# Altium PCB TestPCB_2561.PcbDoc
Units mm, origin at the board's own origin, x right, y up, seen from the top; angles counter-clockwise.
Board outline 90 x 100 mm, 2 copper layers (Top Layer, Bottom Layer); 24 components, 25 nets, 147 pads, 11 vias.
Unrouted connection lines stored in the file: 24.
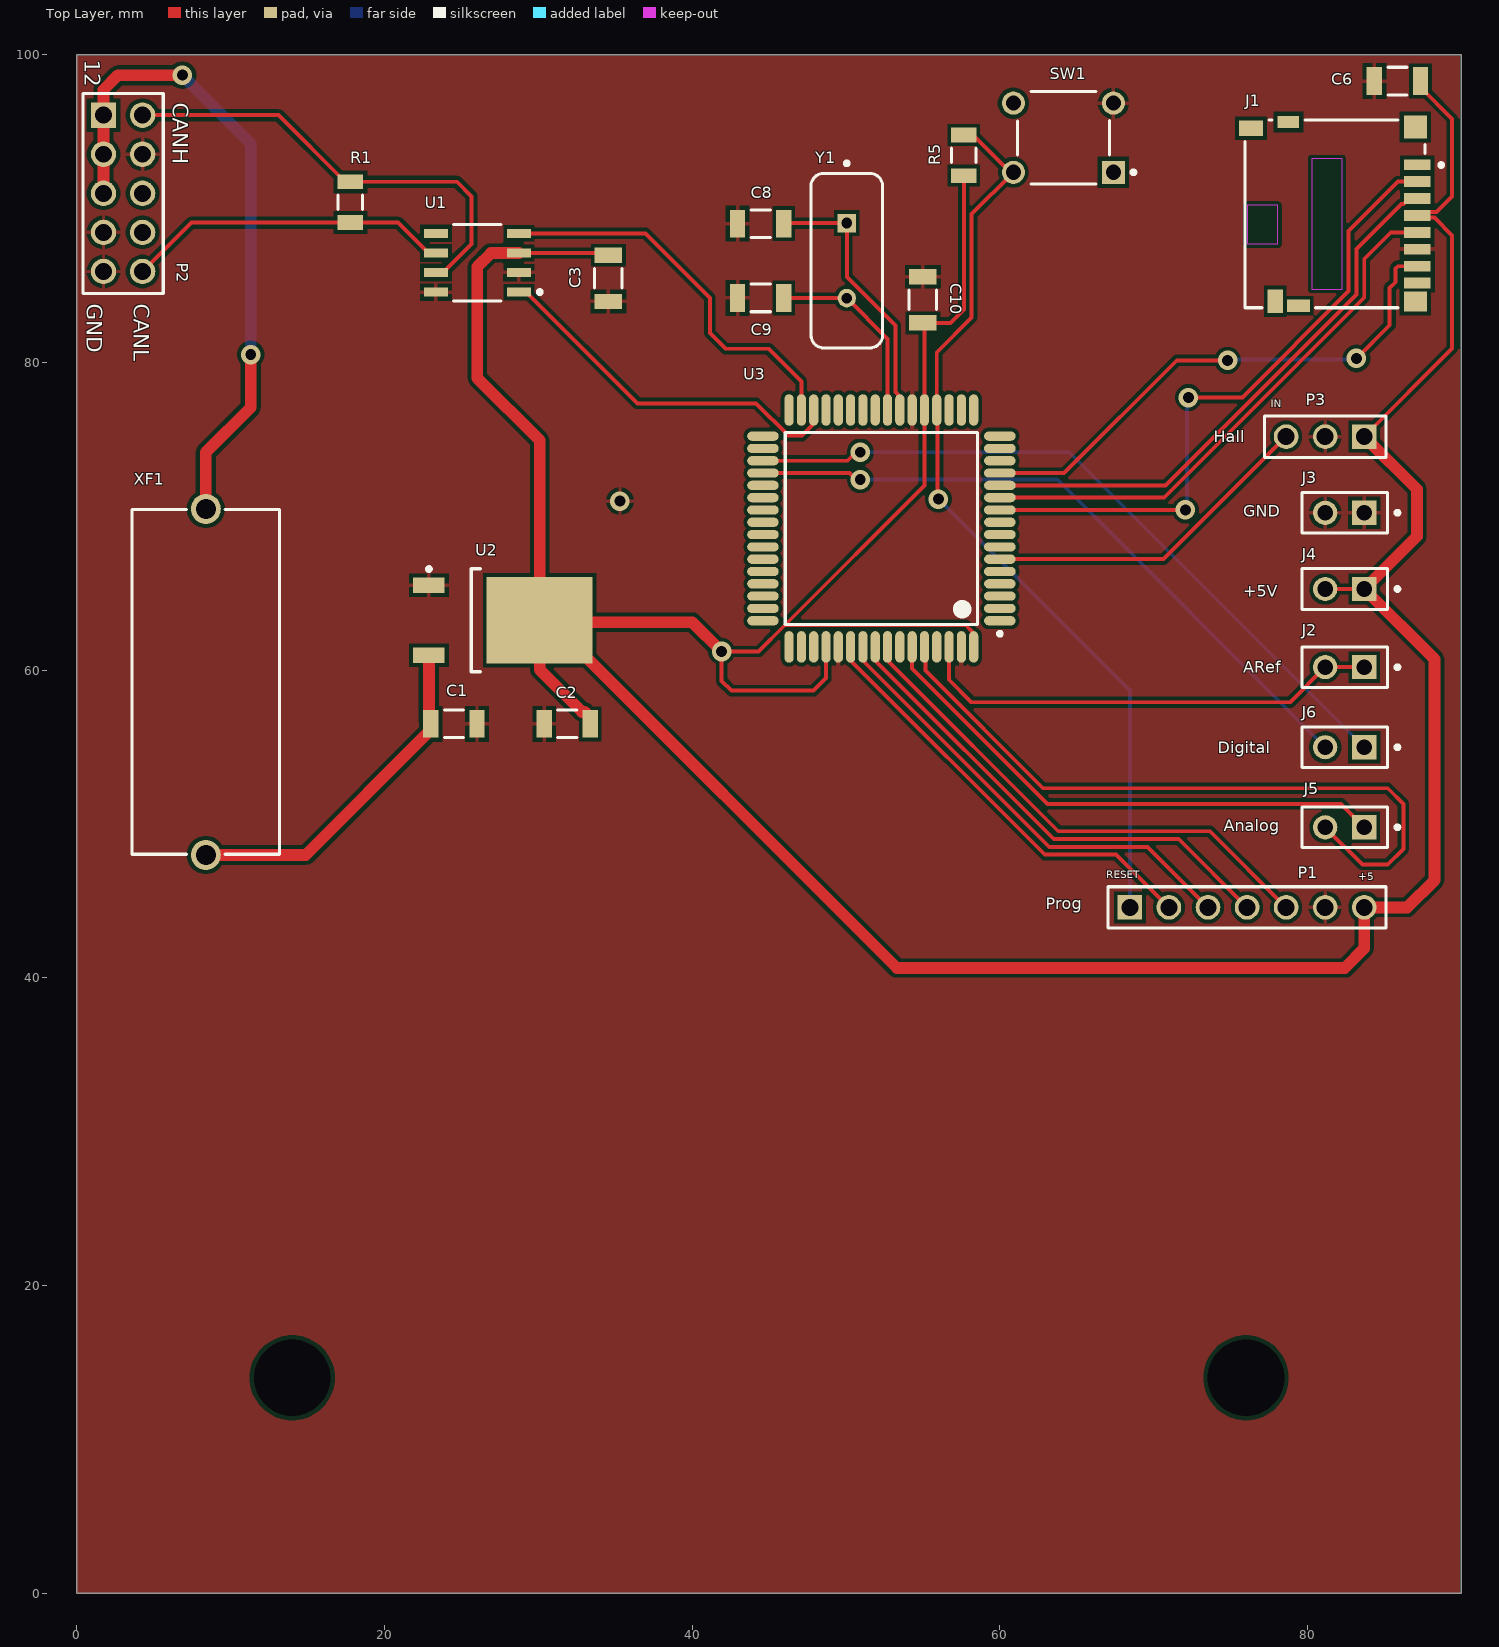
[diagram p0: Top Layer view]
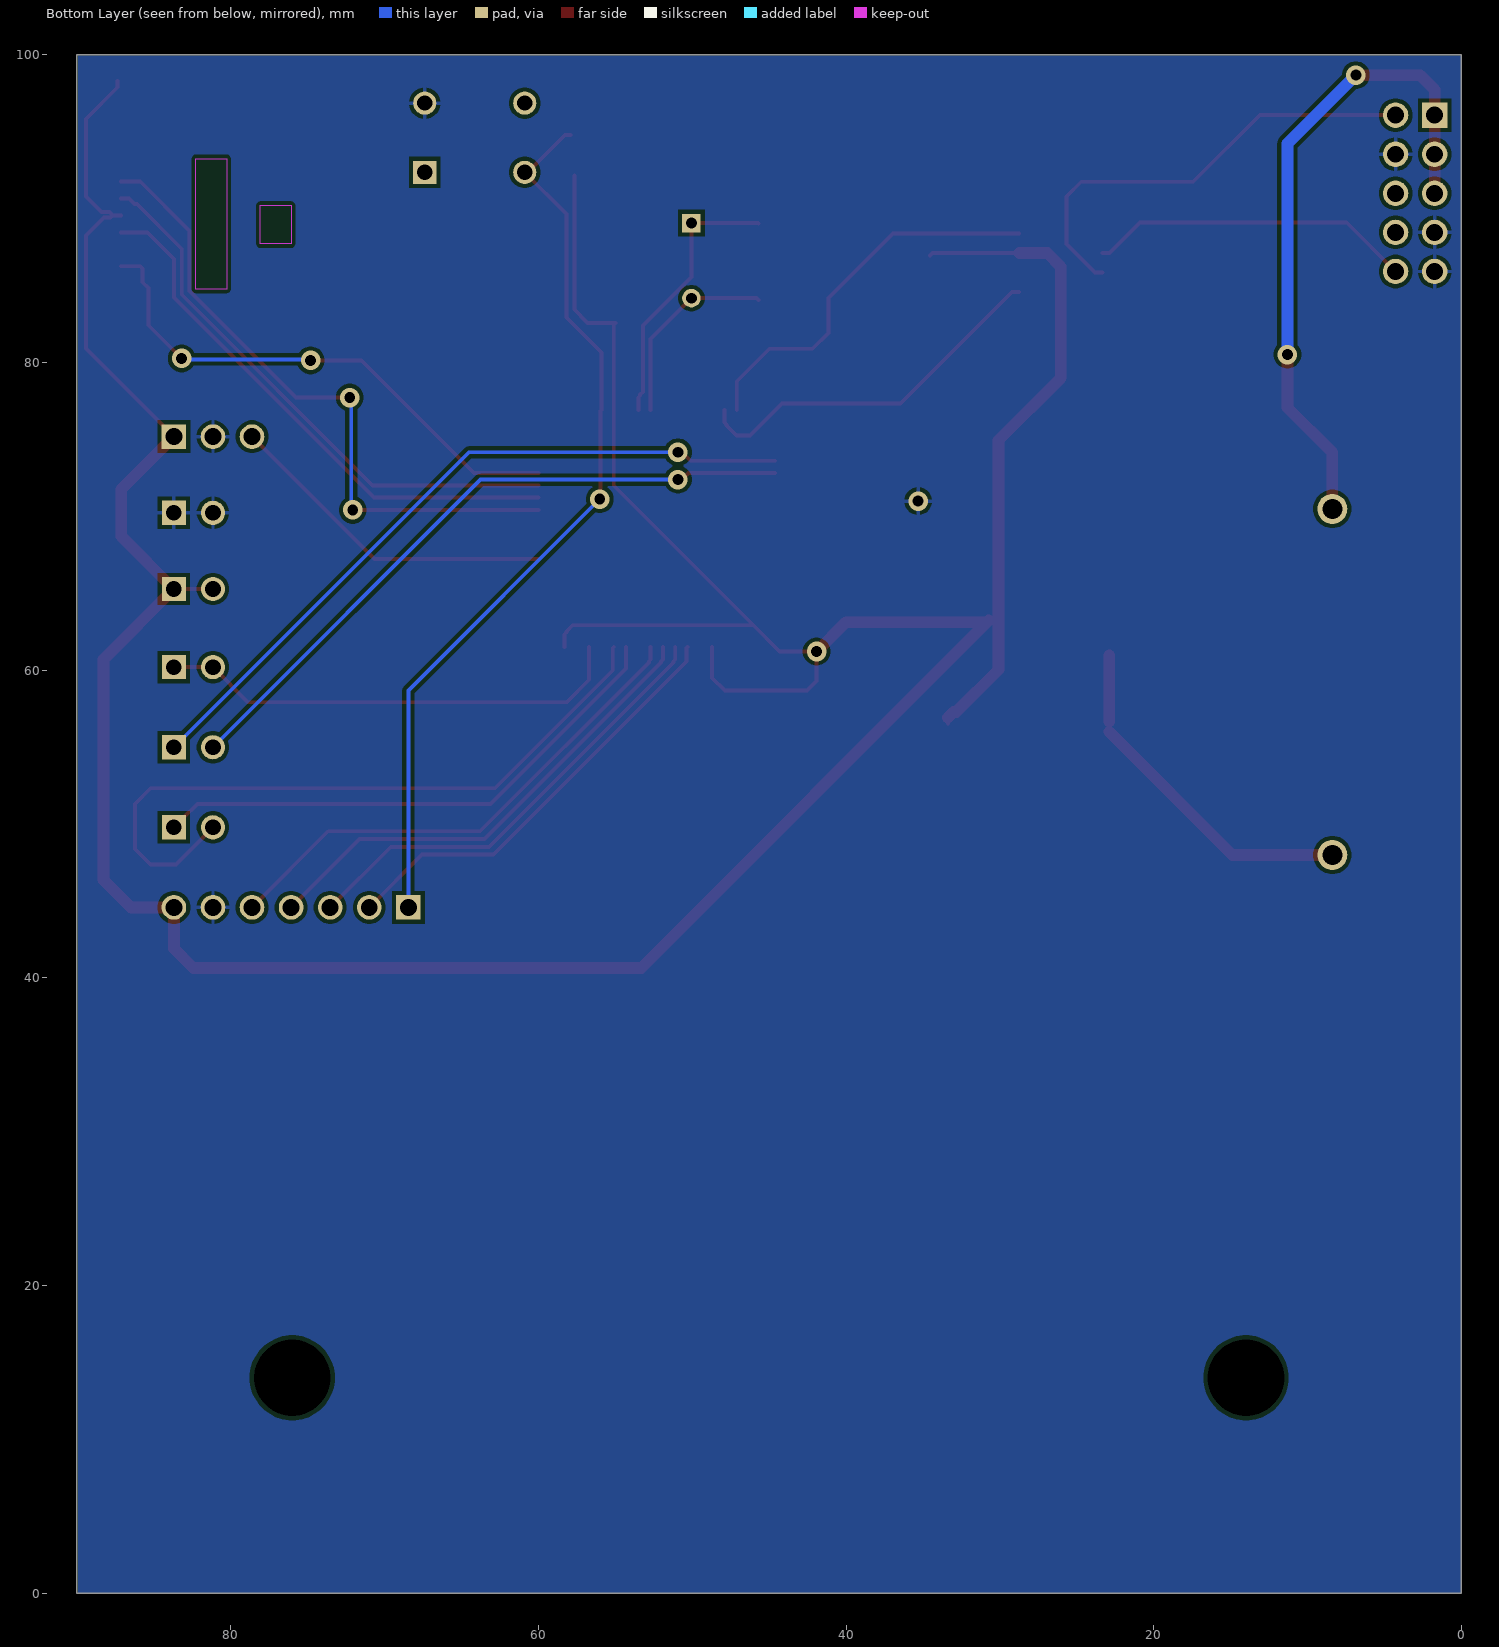
[diagram p1: Bottom Layer view, seen from below]
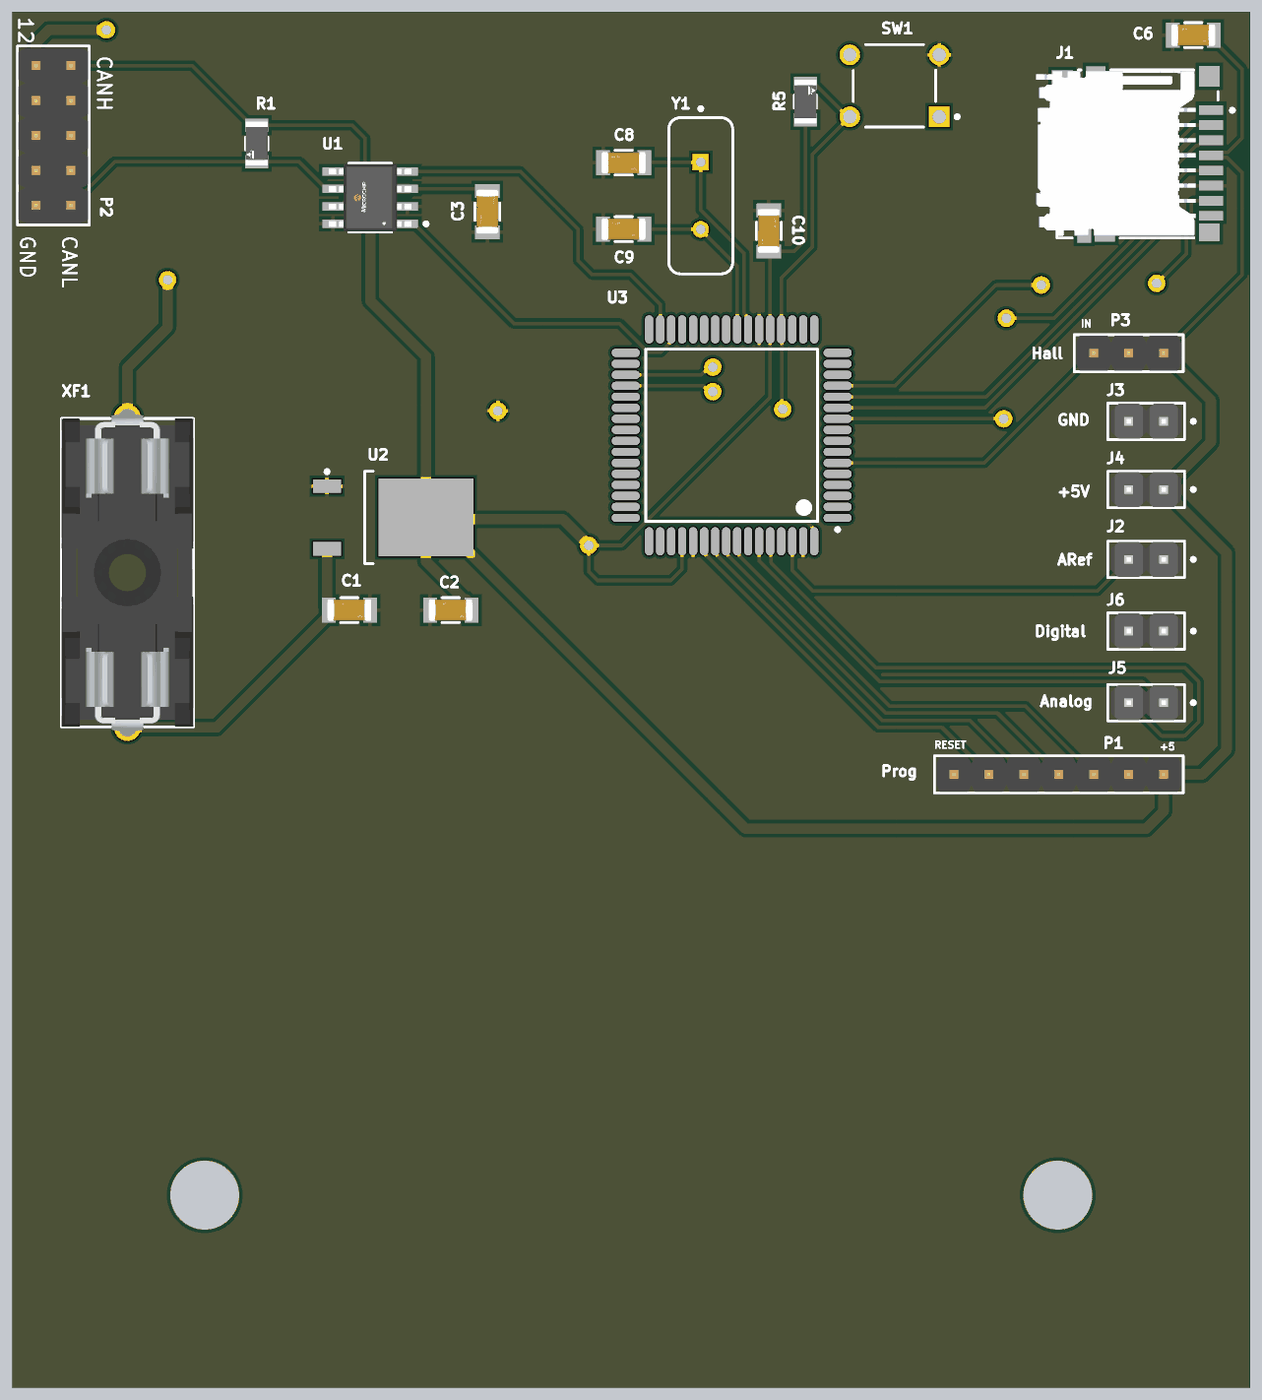
[diagram p2: 3D render of the assembled board from above, using the file's embedded part models]

## Layer stack, top to bottom
Top Solder: solder mask 0.0102, Solder Resist, Dk 3.5
Top Layer: signal copper 0.0356
Dielectric 1: dielectric 0.32, FR-4, Dk 4.8
Bottom Layer: signal copper 0.0356
Bottom Solder: solder mask 0.0102, Solder Resist, Dk 3.5

## Board outline
0,0 0,100 90,100 90,0

## Design rules (kind name [scope] priority, off if disabled: settings)
Clearance [All] p1: gap=0.254 ignorepadtopadclearanceinfootprint=FALSE except(0: Arc-Hole Track-Hole SMDPad-Hole THPad-Hole Via-Hole Fill-Hole Poly-Hole Region-Hole Text-Hole)
PolygonConnect [All] p1: connectstyle=Relief reliefconductorwidth=0.254 reliefentries=4 polygonreliefangle="90 Angle" airgapwidth=0.254
RoutingVias [All] p1: holewidth=0.711 width=1.27 viastyle="Through Hole" minholewidth=0.711 minwidth=1.27 maxholewidth=0.711 maxwidth=1.27
SolderMaskExpansion [All] p1: expansion=0.102 istentingtop=FALSE
Width [All] p1: maxlimit=1.27 minlimit=0.254 preferedwidth=0.254 minimp=50.000000 maximp=50.000000 favimp=50.000000
30 further rules are at their usual default settings.

## Components (designator, comment, footprint, x,y, rotation, side; value= is the part's Value field where it differs from the comment)
C1 "10uF" FP-CC1206-1_25-MFG 24.511,56.515 r180 top value="100 nF"
C2 "10uF" FP-CC1206-1_25-MFG 31.877,56.515 r180 top value="100 nF"
C3 "100nF" FP-CC1206-1_25-MFG 34.544,85.471 r270 top value="100 nF"
C6 "100nF" FP-CC1206-1_25-MFG 85.852,98.298 r180 top value="100 nF"
C8 "22pF" FP-CC1206-1_25-MFG 44.45,89.027 r180 top value="100 nF"
C9 "22pF" FP-CC1206-1_25-MFG 44.45,84.201 r180 top value="100 nF"
C10 "100nF" FP-CC1206-1_25-MFG 54.991,84.074 r90 top value="100 nF"
J1 "1140084168" FP-1140084168-0 81.788,89.662 r90 top
J2 "M20-9990246" FP-M20-9990246-MFG 82.423,60.198 r180 top
J3 "M20-9990246" FP-M20-9990246-MFG 82.423,70.231 r180 top
J4 "M20-9990246" FP-M20-9990246-MFG 82.423,65.278 r180 top
J5 "M20-9990246" FP-M20-9990246-MFG 82.423,49.784 r180 top
J6 "M20-9990246" FP-M20-9990246-MFG 82.423,54.991 r180 top
P1 "61300711121" 61300711121 76.073,44.577 r0 top
P2 "61301021121" 61301021121 3,91 r270 top
P3 "61300311121" 61300311121 81.153,75.184 r180 top
R1 "10K" FP-CRCW1206-e3-IPC_C 17.78,90.424 r270 top
R5 "10K" FP-CRCW1206-e3-IPC_C 57.658,93.472 r90 top
SW1 "1825910-6" TECO-1825910-6_V 64.135,94.615 r180 top
U1 "MCP2561FDT-E/SN" FP-C04-057-SN-MFG 26.035,86.487 r180 top
U2 "TLE4284D V50" INF-PG-TO252-3-11_M 27.686,63.246 r0 top
U3 "AT90CAN64-16AU" 64A_M 52.3,69.215 r180 top
XF1 "696103201002" 696103201002 8.382,59.235 r270 top
Y1 "16Mhz" FOX-FOXSLF160-20 50.052,86.624 r270 top

## Footprints (in the part's own frame and the unit in brackets; to place one, negate y for a bottom-side part, rotate by r counter-clockwise, add the part's x,y. Pads: shape width x height; smd on the part's side, far side on the other; paste and mask are expansions set on the pad)
64A_M [mm] "Thin QFP, 64-Leads, Body 14x14mm, Pitch 0.8mm, IPC Low Density"
  oval 2.05x0.6 smd: 1(-7.7,6) 2(-7.7,5.2) 3(-7.7,4.4) 4(-7.7,3.6) 5(-7.7,2.8) 6(-7.7,2) 7(-7.7,1.2) 8(-7.7,0.4) 9(-7.7,-0.4) 10(-7.7,-1.2) 11(-7.7,-2) 12(-7.7,-2.8) 13(-7.7,-3.6) 14(-7.7,-4.4) 15(-7.7,-5.2) 16(-7.7,-6) 33(7.7,-6) 34(7.7,-5.2) 35(7.7,-4.4) 36(7.7,-3.6) 37(7.7,-2.8) 38(7.7,-2) 39(7.7,-1.2) 40(7.7,-0.4) 41(7.7,0.4) 42(7.7,1.2) 43(7.7,2) 44(7.7,2.8) 45(7.7,3.6) 46(7.7,4.4) 47(7.7,5.2) 48(7.7,6)
  oval 0.6x2.05 smd: 17(-6,-7.7) 18(-5.2,-7.7) 19(-4.4,-7.7) 20(-3.6,-7.7) 21(-2.8,-7.7) 22(-2,-7.7) 23(-1.2,-7.7) 24(-0.4,-7.7) 25(0.4,-7.7) 26(1.2,-7.7) 27(2,-7.7) 28(2.8,-7.7) 29(3.6,-7.7) 30(4.4,-7.7) 31(5.2,-7.7) 32(6,-7.7) 49(6,7.7) 50(5.2,7.7) 51(4.4,7.7) 52(3.6,7.7) 53(2.8,7.7) 54(2,7.7) 55(1.2,7.7) 56(0.4,7.7) 57(-0.4,7.7) 58(-1.2,7.7) 59(-2,7.7) 60(-2.8,7.7) 61(-3.6,7.7) 62(-4.4,7.7) 63(-5.2,7.7) 64(-6,7.7)
  silkscreen extent -7.83,-6.25 6.25,6.97, body extent -7,-7 7,7, height 1.6
61300311121 [mm] "Pin Header, pitch 2.54 mm, THT, Vertical, single row, 3p"
  rect 1.6x1.6 hole 1.1: 1(-2.54,0)
  round 1.6 hole 1.1: 2(0,0) 3(2.54,0)
  silkscreen extent -3.96,-1.35 3.96,1.35, body extent -3.81,-1.27 3.81,1.27, height 8.57
61300711121 [mm] "Pin Header, pitch 2.54 mm, THT, Vertical, single row, 7p"
  rect 1.6x1.6 hole 1.1: 1(-7.62,0)
  round 1.6 hole 1.1: 2(-5.08,0) 3(-2.54,0) 4(0,0) 5(2.54,0) 6(5.08,0) 7(7.62,0)
  silkscreen extent -9.04,-1.35 9.04,1.35, body extent -8.89,-1.27 8.89,1.27, height 8.57
61301021121 [mm] "Pin Header, pitch 2.54 mm, THT, Vertical, dual row, 10p"
  rect 1.65x1.65 hole 1.1: 1(-5.08,-1.27)
  round 1.65 hole 1.1: 2(-5.08,1.27) 3(-2.54,-1.27) 4(-2.54,1.27) 5(0,-1.27) 6(0,1.27) 7(2.54,-1.27) 8(2.54,1.27) 9(5.08,-1.27) 10(5.08,1.27)
  silkscreen extent -6.5,-2.62 6.5,2.62, body extent -6.35,-2.54 6.35,2.54, height 8.59
696103201002 [mm] "FUSEHOLDER BLOCKS - PCB - CLIP COVER - THR"
  round 1.95 hole 1.3: 1(-11.25,0) 2(11.25,0)
  silkscreen extent -11.2,-4.8 11.2,4.8, body extent -12.05,-4.8 12.05,4.8, height 11.55
FOX-FOXSLF160-20 [mm] "THD, 2-Leads, Body 11.35x4.65mm"
  rect 1.2x1.2 hole 0.7: 1(-2.44,0)
  round 1.2 hole 0.7: 2(2.44,0)
  silkscreen extent -6.45,-2.32 5.68,2.32, body extent -5.67,-2.32 5.68,2.33, height 3.6
FP-1140084168-0 [mm]
  rect 0.7x1.75 smd paste+0 mask+0: 1(3.2,-5.35) 2(2.1,-5.35) 3(1,-5.35) 4(-0.1,-5.35) 5(-1.2,-5.35) 6(-2.3,-5.35) 7(-3.4,-5.35) 8(-4.5,-5.35)
  rect 1x1.55 smd paste+0 mask+0: 9(5.575,5.45)
  rect 1.55x1 smd paste+0 mask+0: 10(-5.675,3.875)
  rect 0.8x1.4 smd paste+0 mask+0: 11(5.975,3.025)
  rect 0.8x1.5 smd paste+0 mask+0: 12(-5.975,2.375)
  rect 1.3x1.5 smd paste+0 mask+0: 13(-5.7,-5.225)
  rect 1.5x1.5 smd paste+0 mask+0: 14(5.65,-5.225)
  Keep-Out Layer region: -4.9,-0.475 3.6,-0.475 3.6,1.525 -4.9,1.525
  Keep-Out Layer region: -1.952,3.717 0.548,3.717 0.548,5.717 -1.952,5.717
  silkscreen extent -6.1,-7.02 6.1,5.85, body extent -6.55,-6.32 6.5,6.32, height 0.25
FP-C04-057-SN-MFG [mm]
  rect 1.55x0.6 smd paste+0 mask+0: 1(-2.7,1.905) 2(-2.7,0.635) 3(-2.7,-0.635) 4(-2.7,-1.905) 5(2.7,-1.905) 6(2.7,-0.635) 7(2.7,0.635) 8(2.7,1.905)
  silkscreen extent -4.18,-2.5 1.55,2.5, body extent -3.57,-2.75 3.57,2.75, height 0.25
FP-CC1206-1_25-MFG [mm]
  rect 1x1.8 smd paste+0 mask+0: 1(-1.5,0) 2(1.5,0)
  silkscreen extent -0.63,-0.9 0.63,0.9, body extent -2.2,-1.25 2.2,1.25, height 0.25
FP-CRCW1206-e3-IPC_C [mm]
  rect 0.956x1.658 smd paste+0 mask+0: 1(-1.326,0) 2(1.326,0)
  silkscreen extent -0.47,-0.8 0.47,0.8, body extent -1.9,-0.97 1.9,0.97, height 0.25
FP-M20-9990246-MFG [mm]
  rect 1.57x1.57 hole 1.02 paste-1000 mask+0: 1(-1.27,0)
  round 1.57 hole 1.02 paste-1000 mask+0: 2(1.27,0)
  silkscreen extent -3.55,-1.32 2.79,1.32, body extent -2.89,-1.42 2.89,1.42, height 0.25
INF-PG-TO252-3-11_M [mm] "DPAK, 3-Leads, Body 6.5x6.12mm, Pitch 2.28mm, IPC Low Density"
  rect 2.05x1 smd: 1(-4.8,2.28) 3(-4.8,-2.28)
  rect 6.9x5.65 smd: 2(2.4,0)
  silkscreen extent -4.92,-3.35 -1.45,3.45, body extent -2.05,-3.32 4.17,3.32, height 2.35
TECO-1825910-6_V [mm] "Switch, 4-Leads, Body 5.99x5.99mm"
  rect 1.5x1.5 hole 0.99: 1(-3.25,2.25)
  round 1.5 hole 0.99: 2(3.25,2.25) 3(-3.25,-2.25) 4(3.25,-2.25)
  silkscreen extent -4.68,-2.99 2.99,3, body extent -3,-2.99 2.99,3, height 5

## Part data
C1 C2 C3 C6 C8 C9 C10: library part CMP-03422-000842-1, "CAP CER 0.1UF 50V X7R 1206", Capacitance="100 nF", Manufacturer=Yageo, Manufacturer Part Number=CC1206KRX7R9BB104, Package=CC1206-1.25, Temperature="-55°C to +125°C", Temperature Characteristic=X7R, Temperature Coefficient=15%, Temperature Range High=+125°C, Temperature Range Low=-55°C, Tolerance=0.1, Voltage Rating="50 V", Automotive=No, Automotive Grade=NA, Category=Cap, ComponentLink2Description=Datasheet, ComponentLink2URL=http://www.yageo.com/documents/recent/UPY-NP0X7R_HV_1KV-to-3KV_11.pdf, Device Class L1="Passive Components", Device Class L2=Capacitors, Device Class L3="Ceramic Capacitors", Digikey Description="CAP CER 0.1UF 50V X7R 1206", Footprint Url=http://www.yageo.com/exep/pages/download/literatures/UPY-C_GEN_24.pdf, Height=1.45mm, Lead Free=Yes, Material=Ceramic, Mouser Description="Multilayer Ceramic Capacitors MLCC - SMD/SMT 100nF 50V X7R 10%", Octopart=https://octopart.com/cc1206krx7r9bb104-yageo-39467816, RoHS=TRUE
J1: library part CMP-02360-000003-1, "CONN MICRO SD CARD PUSH-PULL R/A", Flammability Rating="UL94 V-0", Package Quantity=7500, Connector Type=Connector, Contact Material="Copper Alloy", Contact Plating=Gold, Depth=11.45mm, Gender=Receptacle, Height=1.55mm, Housing Material=Polymer, Lead Free="Lead Free", Length=15.6mm, Mount="Surface Mount", Number of Contacts=8, Number of Rows=1, Orientation="Right Angle", Packaging="Tape and Reel", Pitch=1.1mm, Radiation Hardening=No, Termination=SMD/SMT
J2 J3 J4 J5 J6: library part CMP-15831-000009-1, "CONN HEADER VERT 2POS 2.54MM", Current Rating=3A, Manufacturer=Harwin, Temperature="-40°C to +105°C", Temperature Range High=+105°C, Temperature Range Low=-40°C, Automotive=No, Category=Conn, ComponentLink2Description=Datasheet, ComponentLink2URL=https://cdn.harwin.com/pdfs/M20-999.pdf, Conn Gender=Male, Conn Orientation=Vertical, Contact Material=Tin,Nickel, Device Class L1=Connectors, Device Class L2="Headers and Wire Housings", Device Class L3=unset, Digikey Description="CONN HEADER VERT 2POS 2.54MM", Height=8.99mm, Lead Free=Yes, Manufacturer Part Number=M20-9990246, Mouser Description="2.54mm (0.1\") Pitch SIL Vertical PC Tail Pin Header, 6.1mm mating pin height, tin, 2 contacts", Number of Contacts=2, Number of Rows=1, Octopart=https://octopart.com/m20-9990246-harwin-2590635, Package=M20-9990246, Pitch=2.54mm, RoHS=TRUE
P1: library part CMP-1502-01074-1, "THT Vertical Pin Header WR-PHD, Pitch 2.54 mm, Single Row, 7 pins", Contact Resistance=20mOhm, Manufacturer="Wurth Elektronik", Operating Temperature=-40to105degC, Rated Current=3A, Withstanding Voltage=500VAC, Working Voltage=250VAC, Datasheet URL=https://katalog.we-online.de/em/datasheet/6130xx11121.pdf, Gender=Male, Manufacturer URL=http://www.we-online.de, Mounting Technology=THT, Orientation=Vertical, Package Reference=61300711121, Packaging=Bag, Part Number=61300711121, Pin Number=7, Pitch=2.54mm, Publisher=WurthElektronik, Row Number=Single
P2: library part CMP-1502-01084-1, "THT Vertical Pin Header WR-PHD, Pitch 2.54 mm, Dual Row, 10 pins", Contact Resistance=20mOhm, Manufacturer="Wurth Elektronik", Operating Temperature=-40to105degC, Rated Current=3A, Withstanding Voltage=500VAC, Working Voltage=250VAC, Datasheet URL=https://katalog.we-online.de/em/datasheet/6130xx21121.pdf, Gender=Male, Manufacturer URL=http://www.we-online.de, Mounting Technology=THT, Orientation=Vertical, Package Reference=61301021121, Packaging=Bag, Part Number=61301021121, Pin Number=10, Pitch=2.54mm, Publisher=WurthElektronik, Row Number=Dual
P3: library part CMP-1502-01062-1, "THT Vertical Pin Header WR-PHD, Pitch 2.54 mm, Single Row, 3 pins", Contact Resistance=20mOhm, Manufacturer="Wurth Elektronik", Operating Temperature=-40to105degC, Rated Current=3A, Withstanding Voltage=500VAC, Working Voltage=250VAC, Datasheet URL=https://katalog.we-online.de/em/datasheet/6130xx11121.pdf, Gender=Male, Manufacturer URL=http://www.we-online.de, Mounting Technology=THT, Orientation=Vertical, Package Reference=61300311121, Packaging=Bag, Part Number=61300311121, Pin Number=3, Pitch=2.54mm, Publisher=WurthElektronik, Row Number=Single
R1 R5: library part CMP-2003-04857-2, "RES Thick Film, 0Ω, 0.25W, 1206", Case Code (Imperial)=1206, Case Code (Metric)=3216, Max Operating Temperature=155°C, Min Operating Temperature=-55°C, Package Quantity=5000, Power Rating=250mW, Resistance=0mR, Temperature Coefficient=100ppm/°C, Tolerance=1%, Voltage Rating=200V, Case/Package=1206, Composition="Thick Film", Contact Plating=Tin, Depth=1.6mm, Height=0.55mm, Lead Free="Lead Free", Length=3.2mm, Military Standard=Not, Mount="Surface Mount", Packaging="Tape and Reel", Radiation Hardening=No, Termination=SMD/SMT, Voltage Rating (DC)=200V, Weight=0.000353oz, Width=1.6mm
SW1: library part CMP-1684-00021-1, "Tact Switch, SPST-NO, 0.05 A, -35 to 85 degC, 4-Pin THD, RoHS, Bulk", Actuator Color=Black, Contact Rating @ Voltage=0.05A@24VDC, Dielectric Strength=500VAC, Manufacturer="TE Connectivity", Maximum AC Voltage Rating=N/A, Maximum Contact Resistance=100mOhm, Maximum DC Voltage Rating=24V, Minimum Insulation Resistance=100MOhm, Operating Temperature=-35to85C, Package Description="4-Pin Through Hole Device, Body 5.99 x 5.99 mm, Pitch 6.5 mm", Package Reference=THD, Actuator Length=1.4mm, Actuator Material=PolybutyleneTerephthalate, Actuator Style=RoundButton, Base Material=N/A, Body Orientation=Straight, Bushing Type=Unthreaded, Contact Material=CopperAlloy, Contact Plating=Silver, Datasheet URL=http://www.te.com/commerce/DocumentDelivery/DDEController?Action=showdoc&DocId=Customer+Drawing%7F1825910%7FC9%7Fpdf%7FEnglish%7FENG_CD_1825910_C9.pdf%7F1825910-6, Datasheet Version="Rev. C9", Dimension=5.99x5mm, Electrical Life=100000Cycles, Family=1825910, Function=MomentaryContact, Housing Material=N/A, Illumination=N/R, Manufacturer URL=http://www.te.com, Mechanical Life=100000Cycles, Mounting=ThroughHole, Packaging=N/A, Part No=1825910-6, Pole Throw Configuration=SPST, Product Weight=N/A, RoHS=Yes, Seal Description=N/A, Seal Location=N/A, Switch Configuration=OFF(ON), Terminal Type=PCPins, Thread Size=N/R
U1: library part CMP-06279-000064-1, "IC TRANSCEIVER 1/1 8SOIC", Case/Package=SOIC, Max Operating Temperature=125°C, Max Supply Voltage=5.5V, Min Operating Temperature=-40°C, Min Supply Voltage=4.5V, Operating Supply Current=70mA, Package Quantity=3300, Data Rate=8Mbps, Mount="Surface Mount", Number of Pins=8, Number of Transceivers=1, Packaging="Tape and Reel", Receiver Hysteresis=200mV, RoHS Compliant=Yes, Series=-, Weight=0.019048oz
U2: library part CMP-1109-00133-1, "Voltage Regulator, 6.4 to 40 V Supply, 5 V Output, -40 to 150 degC, PG-TO252-3-11, Reel, Green", Dropout Voltage="1300 mV", Manufacturer=Infineon, Max. Output Current="1000 mA", Operating Range="6.4 to 40 V", Output Voltage=5V, Typical Quiescent Current="800 uA", Accuracy="3 %", ComponentLink1Description="Manufacturer URL", ComponentLink1URL=http://www.infineon.com/, ComponentLink2Description=Datasheet, ComponentLink2URL=http://www.infineon.com/dgdl/TLE4284_DS_21.pdf?folderId=db3a304318f3fe290118f5a433570040&fileId=db3a30431c48a312011c51ca22f501de&location=en.Products.Automotive_ICs.Linear_Voltage_Regulators_for_Automotive-Applications.Linear_Voltage_Regulators_-_Selection, ComponentLink3Description="Package Specification", ComponentLink3URL=http://www.infineon.com/dgdl/BTS142_DS_13.pdf?folderId=db3a3043163797a6011667aa084c0e01&fileId=db3a3043163797a6011667ac98be0e02&location=en.Products.Automotive_ICs.Smart_High-_and_Low-Side_Switches.HITFET___TEMPFET__-_Smart_Low-Side_Switches.DATASHEET.BTS1, DatasheetVersion="Rev. 2.1", Green=TRUE, Halogen-free=TRUE, Mounting Technology="Surface Mount", PackageDescription="3-Pin Plastic (Green) Transistor Single Outline Package, 6.5 x 6.12 mm Body, 2.28 mm Pitch", PackageReference=PG-TO252-3-11, PackageVersion=Dec-06, Packing=Reel, PartNumber="TLE4284D V50", Regulator Type="single output"
U3: library part CMP-0096-00123-2, "8-bit AVR Microcontroller, 64KB Flash and CAN Controller, 53 GPIO pins, Industrial Grade (-40° to +85°C), 64-pin LQFP, Green", Code_JEDEC=MS-026-AEB, ComponentLink1Description="Manufacturer URL", ComponentLink1URL=http://www.atmel.com/, ComponentLink2Description="AT90CAN32/64/128 Datasheet", ComponentLink2URL=http://www.atmel.com/dyn/resources/prod_documents/doc7679.pdf, ComponentLink3Description="AT90CAN32/64/128 Summary", ComponentLink3URL=http://www.atmel.com/dyn/resources/prod_documents/7679S.pdf, DatasheetVersion="revH, Aug-2008", PackageDescription="64-Pin Plastic Thin Profile Quad Flat Pack, 14 x 14 x 1.0 mm Body, 0.8 mm Pitch (TQFP)", PackageReference=64A, PackageVersion="revC, Oct-2010", RevisionNote="PackageVersion updated. URLs added."
XF1: library part CMP-1502-00239-1, "WR-FSH Fuse Holder Blocks Fuse Holder Blocks Clip Cover for PCB - THR Version", Manufacturer="Wurth Elektronik", Operating Temperature=-30to120degC, Datasheet URL=https://katalog.we-online.de/em/datasheet/696103201002.pdf, Fuse Size=5x20mm, Manufacturer URL=http://www.we-online.de, Mounting Technology=THR, Package Reference=696103201002, Packaging=Box, Part Number=696103201002, Publisher=WurthElektronik
Y1: library part CMP-1749-00003-1, "Resistance Weld Thru-Hole Crystal, 16 MHz, -20 to 70 degC, 2-Pin THD, RoHS, Bulk", Case\Package=Axial, Max Operating Temperature="155 degC", Min Operating Temperature="-55 degC", Package Quantity=200, Power Rating="250 mW", Resistance="221 kohm", Tolerance=1%, Voltage Rating="250 V", ComponentLink1Description="Manufacturer URL", ComponentLink1URL=http://www.foxonline.com/, ComponentLink2Description=Datasheet, ComponentLink2URL=http://www.foxonline.com/pdfs/hc49slf.pdf, DatasheetVersion=Mar-15, Length="0.248 inch", Mount="Through Hole", PackageDescription="2-Pin Through Hole Device, Body 11.35 x 4.65 mm", PackageReference=FOXSLF160-20, Packaging=Bulk, RoHSCompliant=true

## Free pads (board coordinates)
  oct 1.524x1.524 hole 5: 4(14,14)
  round 1.524 hole 5: 5(76,14)

## Via types
v1: diameter 1.27, hole 0.711, Top Layer to Bottom Layer, 11 vias

## Nets (pads, with @x,y where several pads share a name; then routed paths per layer and width w, separated by ;. In a path a pad name is that pad's centre, name@x,y a point inside that pad or via, vN(x,y) a via of type N, cw(c..) or ccw(c..) an arc to the next point about the centre after c; other vN are vias at no path point)
12Vline: C1.2 U2.3 XF1.2 | length 22.8
  Top Layer w0.254: C1.2@22.886,55.99 C1.2@22.886,56.64
  Top Layer w0.762: XF1.2 14.881,47.985 C1.2@22.886,55.99 ; C1.2@22.886,56.64 U2.3
+5: C2.1 C3.1 C6.1 C10.1 J1.4 J4.1 J4.2 P1.7 P3.1 R5.1 U1.3 U2.2 U3.21 U3.52 U3.64 | length 254.8
  Top Layer w0.254: U1.3 34.393,87.122 C3.1 ; U2.2 U2.2@30.711,63.246 ; 32.838,57.288 C2.1@33.004,57.288 ; C2.1 C2.1@33.377,56.915 ; U3.52 48.7,59.495 47.879,58.674 42.545,58.674 41.91,59.309 v1(41.91,61.214) 44.311,61.214 46.018,62.921 ; R5.1 57.658,83.439 56.793,82.574 C10.1 55.1,82.465 U3.21 55.1,72.003 46.018,62.921 ; U3.64 58.3,62.334 58.181,62.453 58.181,62.522 57.782,62.921 46.018,62.921 ; J4.2 J4.1 ; P3.1 89.408,80.899 89.408,88.265 88.245,89.428 87.797,89.428 J1.4@87.663,89.562 ; J1.4 J1.4@87.663,89.562 ; C6.1 87.352,97.898 89.408,95.842 89.408,90.805 88.388,89.785 87.886,89.785 J1.4@87.663,89.562
  Top Layer w0.762: U1.3 26.924,87.122 26.035,86.233 26.035,78.99 30.086,74.939 U2.2 30.086,60.04 32.838,57.288 ; U2.2@30.711,63.246 U2.2@30.838,63.119 ; C2.1@33.004,57.288 C2.1@33.377,56.915 ; v1(41.91,61.214) 40.005,63.119 U2.2@30.838,63.119 ; P3.1 87.122,71.755 87.122,68.707 J4.1 88.265,60.706 88.265,46.355 86.487,44.577 P1.7 83.693,41.91 82.423,40.64 53.317,40.64 U2.2@30.838,63.119
+12: P2.1 P2.3 P2.5 XF1.1 | length 43.5
  Top Layer w0.762: P2.5 P2.3 P2.1 1.73,97.742 2.667,98.679 v1(6.858,98.679) ; XF1.1 8.382,74.158 11.303,77.079 v1(11.303,80.518)
  Bottom Layer w0.762: v1(6.858,98.679) 11.303,94.234 v1(11.303,80.518)
AnalogIO1: J5.1 U3.59 | length 35.1
  Top Layer w0.254: U3.59 54.3,60.109 63.101,51.308 82.169,51.308 83.035,50.442 J5.1
AnalogIO2: J5.2 U3.60 | length 45.7
  Top Layer w0.254: U3.60 55.166,61.449 55.166,59.966 62.808,52.324 85.217,52.324 86.233,51.308 86.233,48.387 85.217,47.371 83.566,47.371 J5.2
AREF: J2.1 J2.2 U3.62 | length 30.7
  Top Layer w0.254: U3.62 56.7,59.378 58.166,57.912 78.867,57.912 J2.2 J2.1
CANH: P2.2 R1.1 U1.7 | length 29.8
  Top Layer w0.254: P2.2 13.099,96.08 17.429,91.75 R1.1 24.709,91.75 25.654,90.805 25.654,87.696 23.81,85.852 U1.7
CANL: P2.10 R1.2 U1.6 | length 21.2
  Top Layer w0.254: P2.10 7.448,89.098 R1.2 20.884,89.098 22.86,87.122 U1.6
Crystal1: C8.1 U3.23 Y1.1 | length 17.9
  Top Layer w0.254: C8.1@45.696,89.027 45.733,89.064 Y1.1 50.052,85.572 53.208,82.416 53.208,78.095 53.381,77.922 53.381,77.853 53.5,77.734 U3.23
Crystal2: C9.1 U3.24 Y1.2 | length 12.8
  Top Layer w0.254: C9.1@45.696,84.074 45.806,84.184 Y1.2 52.7,81.536 U3.24
DigitalIO1: J6.1 U3.35 | length 47.3
  Top Layer w0.254: U3.35 50.099,73.615 50.652,74.168 v1(50.927,74.168)
  Bottom Layer w0.254: v1(50.927,74.168) 64.516,74.168 J6.1
DigitalIO2: J6.2 U3.36 | length 43.9
  Top Layer w0.254: U3.36 50.227,72.815 50.652,72.39 v1(50.927,72.39)
  Bottom Layer w0.254: v1(50.927,72.39) 63.754,72.39 J6.2
GND: C1.1 C2.2 C3.2 C6.2 C8.2 C9.2 C10.2 J1.6 J3.1 J3.2 P1.6 P2.4 P2.7 P2.9 P3.2 SW1.3 U1.2 U1.8 U2.1 U3.22 U3.53 U3.63
  other v1: 35.306,70.993
IN_COMP: P3.3 U3.6 | length 21.9
  Top Layer w0.254: U3.6 70.644,67.215 P3.3
MISO: J1.7 U3.13 | length 34.6
  Top Layer w0.254: U3.13 64.183,72.815 71.505,80.137 v1(74.803,80.137) ; v1(83.185,80.264) 85.344,82.423 85.344,84.836 85.725,85.217 85.725,86.113 85.874,86.262 J1.7
  Bottom Layer w0.254: v1(74.803,80.137) 74.867,80.2 83.121,80.2 v1(83.185,80.264)
MOSI: J1.3 U3.12 | length 36.6
  Top Layer w0.254: U3.12 70.773,72.015 83.185,84.427 83.185,87.373 86.105,90.293 86.244,90.293 86.613,90.662 J1.3
"PD5 TXD": U1.1 U3.30 | length 24.2
  Top Layer w0.254: U1.1 29.21,84.582 36.449,77.343 44.16,77.343 46.25,75.253 47.126,75.253 47.781,75.908 47.781,75.977 47.9,76.096 U3.30
"PD6 RXD": U1.4 U3.31 | length 25.5
  Top Layer w0.254: U1.4 36.957,88.392 41.148,84.201 41.148,81.915 42.164,80.899 44.958,80.899 47.1,78.757 U3.31
RESET: P1.1 R5.2 SW1.2 U3.20 | length 59.1
  Top Layer w0.254: v1(56.007,71.12) 55.953,71.174 55.953,76.861 U3.20 55.9,80.665 58.166,82.931 58.166,89.646 SW1.2 ; R5.2@57.912,94.798 58.263,94.798 60.696,92.365 SW1.2@60.833,92.365
  Bottom Layer w0.254: v1(56.007,71.12) 68.453,58.674 P1.1@68.453,44.499
SCK: J1.5 U3.11 | length 35.8
  Top Layer w0.254: U3.11 70.692,71.215 83.693,84.216 83.693,86.741 85.414,88.462 J1.5
SS: J1.2 U3.10 | length 42.4
  Top Layer w0.254: U3.10 v1(72.066,70.415) ; v1(72.263,77.724) 75.764,77.724 82.677,84.637 82.677,88.557 85.882,91.762 J1.2
  Bottom Layer w0.254: v1(72.066,70.415) 72.164,70.513 72.164,77.625 v1(72.263,77.724)
TCK: P1.5 U3.57 | length 33.4
  Top Layer w0.254: U3.57 52.7,60.696 52.819,60.577 52.819,60.508 63.799,49.528 73.662,49.528 P1.5
TDI: P1.2 U3.54 | length 28.2
  Top Layer w0.254: U3.54 50.366,61.449 50.366,60.561 62.923,48.004 67.566,48.004 P1.2
TDO: P1.3 U3.55 | length 30
  Top Layer w0.254: U3.55 51.1,60.696 51.219,60.577 51.219,60.508 63.215,48.512 69.598,48.512 P1.3
TMS: P1.4 U3.56 | length 31.7
  Top Layer w0.254: U3.56 51.9,60.696 52.019,60.577 52.019,60.508 63.507,49.02 71.63,49.02 P1.4
pads on no net: J1.1 J1.8 J1.9 J1.10 J1.11 J1.12 J1.13 J1.14 P2.6 P2.8 SW1.1 SW1.4 U1.5 U3.1 U3.2 U3.3 U3.4 U3.5 U3.7 U3.8 U3.9 U3.14 U3.15 U3.16 U3.17 U3.18 U3.19 U3.25 U3.26 U3.27 U3.28 U3.29 U3.32 U3.33 U3.34 U3.37 U3.38 U3.39 U3.40 U3.41 U3.42 U3.43 U3.44 U3.45 U3.46 U3.47 U3.48 U3.49 U3.50 U3.51 U3.58 U3.61

## Polygon pours and split planes (outlines as drawn)
GND on Bottom Layer "GND_L02_P000" (solid, pour order 0): 0,0 89.916,0 89.916,99.949 0,99.949
GND on Top Layer "GND_L01_P001" (solid, pour order 1): 0,0 89.916,0 89.916,99.949 0,99.949

## Silkscreen, mask and mechanical layers (free items; w line width, h text height)
Top Overlay:
  text "IN" at 77.597,77.089 h0.51
  text "Hall" at 73.914,74.803 h0.76
  text "GND" at 75.819,69.977 h0.76
  text "+5V" at 75.819,64.77 h0.76
  text "ARef" at 75.819,59.817 h0.76
  text "Digital" at 74.168,54.61 h0.76
  text "Analog" at 74.549,49.53 h0.76
  text "Prog" at 62.992,44.45 h0.76

## Text inside footprints (layer, text, board x,y; h text height)
P1: Top Overlay "+5" at 83.312,46.355 h0.51; Top Overlay "RESET" at 66.929,46.482 h0.51
P2: Top Overlay "CANH" at 6.223,96.901 h1.02 r270; Top Overlay "12" at 0.508,99.695 h1.02 r270; Top Overlay "GND" at 0.635,83.82 h1.02 r270; Top Overlay "CANL" at 3.683,83.82 h1.02 r270